# Altium PCB Pranus_PSH-C_B4_2015年3月30日.PcbDoc (part 2 of 2)
Units mil, origin at the board's own origin, x right, y up, seen from the top; angles counter-clockwise.
Board outline 3352.66 x 2784.14 mil, 2 copper layers (Top Layer, Bottom Layer); 108 components, 78 nets, 412 pads, 296 vias.
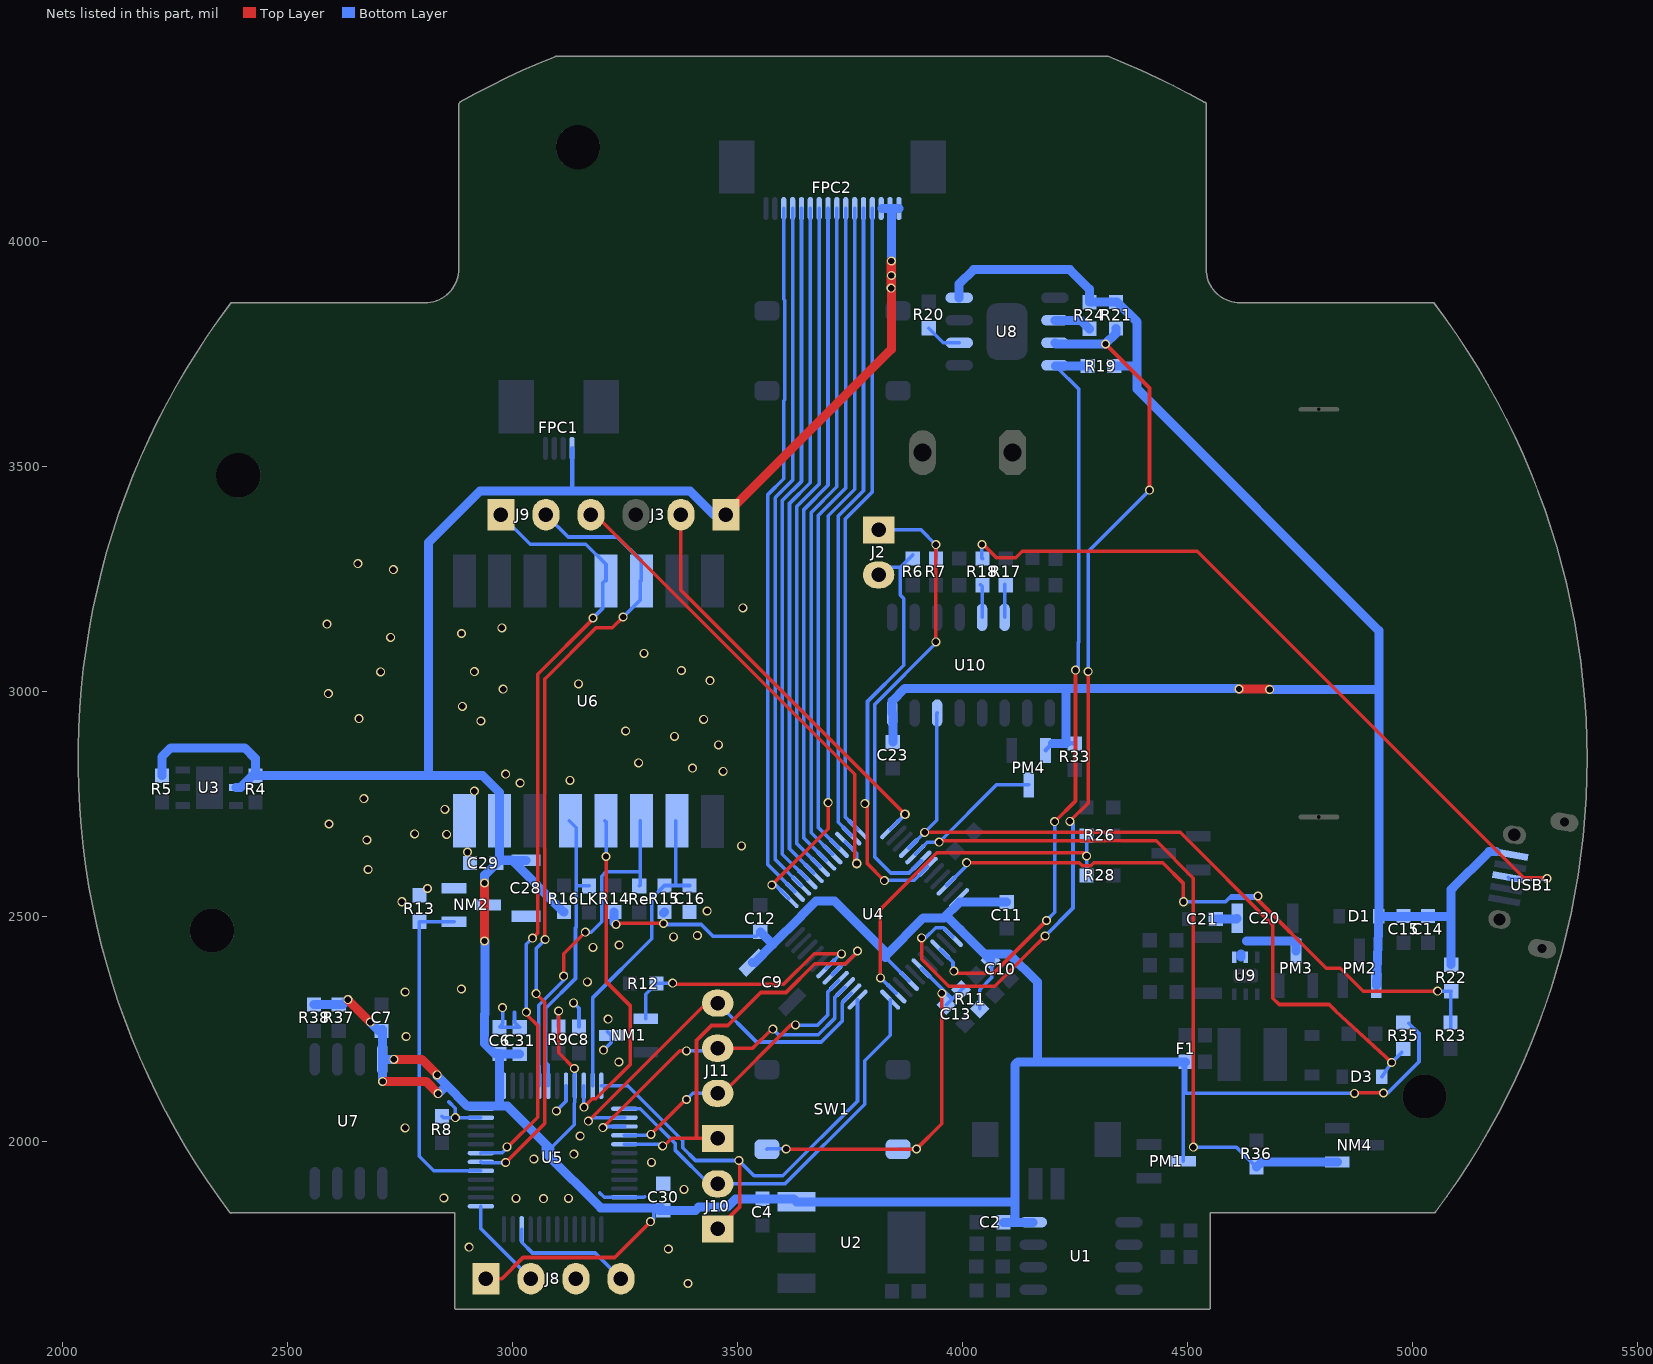
[diagram p2: the nets of this part, all layers, seen from the top]

## Via types
v1: diameter 20, hole 14, Top Layer to Bottom Layer, 294 vias
v2: diameter 22, hole 14, Top Layer to Bottom Layer, 2 vias

## Nets (pads, with @x,y where several pads share a name; then routed paths per layer and width w, separated by ;. In a path a pad name is that pad's centre, name@x,y a point inside that pad or via, vN(x,y) a via of type N, cw(c..) or ccw(c..) an arc to the next point about the centre after c; other vN are vias at no path point) (continued)
NetR18_1: R18.1 USB1.3 | length 1696.9
  Top Layer w8: v1(4043.86,3326.47) 4044.56,3327.17 4044.56,3328.67 4076.26,3296.97 4118.96,3296.97 4133.16,3311.17 4522.44,3311.17 5247.34,2586.27 5297.06,2586.27 v1(5299.16,2584.17)
  Bottom Layer w8: v1(4043.86,3326.47) 4043.86,3296.3 R18.1@4045.06,3295.1 ; USB1.3@5213.29,2586.72 5216.95,2583.07 5298.06,2583.07 v1(5299.16,2584.17)
NetR19_2: R19.2 U4.4 U8.8 | length 1673.8
  Top Layer w8: v1(3981.26,2378.57) 3986.46,2373.37 4069.66,2373.37 v1(4187.36,2491.07) ; v1(4205.56,2710.47) 4251.76,2756.67 v1(4251.76,3047.17)
  Bottom Layer w8: U4.4@3951.32,2426.52 3979.56,2398.28 3979.56,2380.27 v1(3981.26,2378.57) ; v1(4187.36,2491.07) 4205.56,2509.27 v1(4205.56,2710.47) ; U8.8@4206.01,3724.49 4207.73,3722.77 4259.36,3671.14 4259.36,3110.77 4257.56,3108.97 4257.56,3052.97 v1(4251.76,3047.17)
  Bottom Layer w20: U8.8@4207.73,3722.77 R19.2@4278.83,3722.77
NetR20_1: R20.1 U8.2 | length 81.3
  Bottom Layer w8: R20.1@3925.56,3806.84 3957.91,3774.49 U8.2@3993.41,3774.49
NetR21_2: R21.2 U4.2 U8.7 | length 2094.6
  Top Layer w8: v1(3910.02,2452.45) 3910.02,2405.31 3970.26,2345.07 4072.26,2345.07 4148.66,2421.47 4148.87,2421.47 4184.17,2456.77 v1(4184.36,2456.77) ; v1(4239.06,2711.47) 4279.76,2752.17 v1(4279.76,3044.37) ; v1(4318.28,3771.99) 4416.16,3674.12 v1(4416.16,3447.17)
  Bottom Layer w8: v1(3910.02,2452.45) 3918.52,2452.45 3941.03,2474.96 3958.55,2474.96 U4.2@3979.15,2454.36 ; v1(4184.36,2456.77) 4246.26,2518.67 4246.26,2704.27 v1(4239.06,2711.47) ; v1(4279.76,3044.37) 4279.76,3310.77 v1(4416.16,3447.17)
  Bottom Layer w20: U8.7@4206.01,3774.49 4208.5,3771.99 v1(4318.28,3771.99) 4342.06,3795.77 R21.2@4342.06,3806.04
NetR22_1: R22.1 R23.2 U4.46 | length 1464.1
  Top Layer w8: v1(4009.8,2619.36) 4260.36,2619.36 4267.35,2612.37 4285.57,2612.37 4292.56,2619.36 4445.47,2619.36 4491.56,2573.27 v1(4491.56,2532.67) ; v1(4657.06,2545.37) 4652.79,2541.1 4808.92,2384.98 4840.12,2384.98 4891.13,2333.97 v1(5056.36,2333.97)
  Bottom Layer w8: U4.46@3965.24,2568.5 4009.8,2613.06 v1(4009.8,2619.36) ; v1(4491.56,2532.67) 4585.08,2532.67 4592.97,2540.56 ; v1(5056.36,2333.97) 5056.59,2333.74 R22.1@5086.56,2333.74 5085.56,2332.74 R23.2@5085.56,2249.2 ; 4592.97,2540.56 4652.25,2540.56 v1(4657.06,2545.37) 4597.78,2545.37 4592.97,2540.56
NetR24_2: R24.2 U8.6 | length 84.3
  Bottom Layer w20: U8.6@4206.01,3824.49 4263.81,3824.49 R24.2@4282.56,3805.74
NetR26_2: R26.2 R28.1 U4.11 | length 847.8
  Top Layer w8: v1(3818.26,2363.77) 3818.26,2515.87 3943.75,2641.36 4269.47,2641.36 v1(4276.46,2634.37)
  Bottom Layer w8: v1(3818.26,2363.77) 3852.94,2329.09 U4.11@3853.88,2329.09 ; R26.2@4276.46,2680.2 v1(4276.46,2634.37) ; v1(4276.46,2634.37) 4276.36,2634.27 R28.1@4276.36,2591 4276.46,2591.1 v1(4276.46,2634.37)
NSWCLK: J8.2 U5.37 | length 207
  Bottom Layer w8: U5.37@2930.71,1856.14 2930.71,1806.22 J8.2@3041.76,1695.17
NSWDIO: J8.4 U5.34 | length 282.9
  Bottom Layer w8: U5.34@3021.26,1804.96 3021.26,1776.11 3045.2,1752.17 3184.76,1752.17 J8.4@3241.76,1695.17
P_3.3V: C2.2 C4.2 C6.1 C7.1 C9.A C10.1 C11.1 C12.1 C28.A C29.1 C30.1 C31.1 F1.2 FPC1.4 FPC2.14 FPC2.15 FPC2.16 J3.1 J8.1 PM1.3 R4.1 R5.1 R9.2 R11.1 R14.2 R15.2 R16.2 R35.2 R37.2 R38.1 U1.8 U2.3 U3.5 U4.1 U4.9 U4.24 U4.48 U5.1 U5.9 U5.24 U5.48 U6.15 U7.8 | length 10643.6
  Top Layer w8: J8.1@2941.76,1695.17 2977.36,1695.17 3024.36,1742.17 3227.76,1742.17 v1(3307.36,1821.77) ; v1(3103.46,2289.97) 3103.46,2197.11 v1(3138.26,2162.3) ; v1(3230.76,2482.37) 3232.86,2484.47 v1(3336.46,2484.47) ; v1(4871.75,2106.87) 4872.82,2107.94 v1(4936.1,2107.94)
  Top Layer w20: v1(2635,2315) v1(2685,2265) ; v1(2712.26,2133.37) 2808.66,2133.37 v1(2835.66,2106.37) ; v1(2737.16,2182.67) 2798.86,2182.67 v1(2833.56,2147.97) ; v1(2938.76,2445.27) v1(2938.76,2574.27) ; J3.1@3475.06,3392.67 3842.56,3760.17 3842.56,3956.27 3842.06,3955.77 v1(3842.06,3895.97)
  Bottom Layer w8: 3084.54,1983.87 3137.76,2037.09 3137.76,2085.28 3139.37,2086.9 U5.9@3139.37,2123.86 3139.37,2161.2 v1(3138.26,2162.3) ; R9.2@3102.72,2255.1 3102.72,2289.23 v1(3103.46,2289.97) ; 3132.64,3445.67 3133.2,3446.23 ; v1(3307.36,1821.77) 3315.03,1829.44 3315.03,1840.84 ; v1(3336.46,2484.47) 3338.87,2482.06 3420.26,2482.06 3446.69,2455.63 3541.03,2455.63 C12.1@3551.32,2465.92 ; 3829.87,2408.77 U4.9@3881.72,2356.92 ; R11.1@4039.13,2295.44 4038.9,2295.67 4038.9,2337.41 4065.68,2364.2 4065.68,2400.59 C10.1@4063.11,2403.16 ; C2.2@4091.41,1820.64 C2.2@4091.5,1820.55 ; PM1.3@4491.55,1955.92 4491.55,2172.32 F1.2@4496.24,2177.01 4496.24,2106.87 v1(4871.75,2106.87) ; v1(4936.1,2107.94) 4945.82,2107.94 5015,2177.12 5015,2240 R35.2@4992.34,2262.66
  Bottom Layer w10: 3133.2,3446.23 FPC1.4@3133.2,3540.07
  Bottom Layer w20: R5.1@2221.86,2812.7 2221.86,2854.47 2241.96,2874.57 2405.92,2874.57 2429.86,2850.63 R4.1@2429.86,2812.7 ; U3.5@2386.47,2786.2 2396.17,2786.2 2422.67,2812.7 R4.1@2429.86,2812.7 ; R38.1@2560,2304.53 R37.2@2615,2304.53 2624.53,2304.53 v1(2635,2315) ; v1(2685,2265) 2704.53,2245.47 C7.1@2710,2245.47 ; C7.1@2712.19,2249.07 2712.19,2183.01 U7.8@2711.85,2182.67 ; v1(2712.26,2133.37) 2711.85,2133.78 U7.8@2711.85,2182.67 ; v1(2737.16,2182.67) U7.8@2711.85,2182.67 ; 2814.06,2815.77 2814.06,3330.57 2929.16,3445.67 3132.64,3445.67 3394.94,3445.67 3447.94,3392.67 J3.1@3475.06,3392.67 ; v1(2833.56,2147.97) 2833.56,2145.85 2853.32,2126.09 ; v1(2835.66,2106.37) 2853.32,2124.03 2853.32,2126.09 ; v1(2938.76,2445.27) 2939.26,2445.77 2939.26,2283.21 2938.48,2282.43 2938.48,2217.85 2960.64,2195.69 C6.1@2972.23,2195.69 ; v1(2938.76,2574.27) 2938.76,2591.9 C29.1@2965.49,2618.63 C29.1@2971.54,2624.68 ; 2972.23,2090.87 C6.1@2972.23,2195.69 ; C31.1@3016.82,2194.63 2973.29,2194.63 C6.1@2972.23,2195.69 ; C28.A@3030.78,2624.68 C28.A@3000.21,2624.68 ; 3074.85,1993.56 3074.85,1974.18 3196.54,1852.49 C30.1@3330.31,1852.49 ; 3084.54,1983.87 2989.74,2078.67 2900.74,2078.67 2853.32,2126.09 ; R16.2@3115.07,2509.81 C28.A@3000.21,2624.68 ; R14.2@3226.75,2509.81 3226.75,2486.38 v1(3230.76,2482.37) ; C30.1@3326.69,1847.14 3407.48,1847.14 3414.4,1854.07 3477.74,1854.07 3496.33,1872.66 C4.2@3556.27,1872.66 3625.34,1872.66 U2.3@3632.03,1865.96 4113.98,1865.96 4117.13,1869.11 ; R15.2@3336.46,2507.85 R15.2@3338.42,2509.81 ; C9.A@3534.35,2397.55 3539.16,2397.55 3579.43,2437.82 ; C12.1@3551.32,2465.92 3579.43,2437.82 ; FPC2.14@3822.34,4072.9 FPC2.15@3839.71,4072.9 ; 3827.76,2422.85 3716.14,2534.47 3675.49,2534.47 3641.36,2500.34 3641.36,2499.75 3579.43,2437.82 ; 3829.87,2408.77 3829.87,2412.99 3913.85,2496.97 3959.16,2496.97 3994.19,2532 C11.1@4098.91,2532 ; v1(3842.06,3895.97) 3842.56,3896.47 3842.56,4070.05 FPC2.15@3839.71,4072.9 ; FPC2.16@3859.4,4072.9 FPC2.15@3839.71,4072.9 ; 3969.3,2496.97 U4.1@3995.7,2470.57 ; U4.1@3995.36,2470.57 U4.1@3995.7,2470.57 ; 4049.9,2416.37 4104.91,2416.37 4166.86,2354.42 4166.86,2183.21 4173.06,2177.01 ; C10.1@4063.11,2403.16 U4.1@3995.7,2470.57 ; C2.2@4091.5,1820.55 4117.13,1820.55 ; U1.8@4157.84,1820.55 4117.13,1820.55 ; F1.2@4496.24,2177.01 4173.06,2177.01 ; R4.1@2429.86,2812.7 2934.63,2812.7 2972.47,2774.86 U6.15@2972.47,2712.67 C29.1@2972.47,2625.62 ; C29.1@2971.54,2624.68 C28.A@3000.21,2624.68 ; C29.1@2971.54,2624.68 C29.1@2972.47,2625.62 ; C29.1@2972.47,2625.62 2999.27,2625.62 C28.A@3000.21,2624.68 ; 4117.13,1820.55 4117.13,1869.11 ; 4117.13,1869.11 4117.13,2170.42 4123.72,2177.01 4173.06,2177.01
  other v1: 3842.66,3924.07 3842.66,3956.27
PSUPPLY: C14.2 C15.2 C23.1 D1.A PM2.1 PM4.2 R19.1 R21.1 R22.2 R24.1 R33.1 U8.4 U10.16 USB1.1 | length 4179.9
  Top Layer w20: v1(4615.03,3005.43) 4681.64,3005.43 v1(4682.99,3004.08)
  Bottom Layer w10: PM4.2@4185.16,2869.06 4200.63,2884.53 R33.1@4250,2884.53
  Bottom Layer w20: C23.1@3845.86,2887.5 3845.86,2950.31 U10.16@3844.2,2951.97 3844.2,2978.31 3872.76,3006.87 4230.3,3006.87 ; U8.4@3993.41,3874.49 3993.41,3905.42 4025.16,3937.17 4239.06,3937.17 4282.56,3893.67 R24.1@4282.56,3864.8 4282.86,3865.1 R21.1@4342.06,3865.1 4344.43,3865.1 4388.37,3821.16 4388.37,3672.28 4925.66,3135 4925.66,3004.08 ; 4200.63,2884.53 4230.3,2884.53 4230.3,3006.87 ; R19.1@4337.89,3722.77 4380.56,3722.77 ; v1(4615.03,3005.43) 4613.59,3006.87 4230.3,3006.87 ; v1(4682.99,3004.08) 4925.66,3004.08 ; PM2.1@4920.16,2346.78 D1.A@4925.66,2500.17 ; R22.2@5086.56,2392.8 5086.56,2559.97 ; 5090.11,2563.52 5086.56,2559.97 ; 5185.76,2644.17 5170.76,2644.17 5086.56,2559.97 ; D1.A@4925.66,2500.17 4980.76,2500.44 5086.56,2500.44 5086.56,2559.97 ; D1.A@4925.66,2500.17 4925.66,3004.08
PSUPPLYBAT: C20.A C21.2 PM3.3 U9.4 U9.5 | length 187.5
  Bottom Layer w20: C21.2@4563.22,2494.24 4609.09,2494.24 C20.A@4610.73,2495.88 ; 4619.76,2409.85 4619.76,2417.02 ; 4631.25,2445.17 4741.76,2445.17 PM3.3@4741.76,2423.56
S_3.3V_RXD: J2.2 R6.1 U4.43 | length 965
  Top Layer w8: v1@3784.46,2750.47 3788.76,2754.77 3788.76,2617.57 v1(3826.86,2579.47)
  Bottom Layer w8: v1(3783.56,2750.47) 3789.64,2756.55 3789.64,2977.49 3870.39,3058.24 3870.39,3206.24 3862.31,3214.32 3862.31,3275.45 ; J2.2@3814.16,3258.97 3830.64,3275.45 3862.31,3275.45 ; v1(3826.86,2579.47) 3827.86,2580.47 3893.69,2580.47 U4.43@3923.48,2610.26 ; R6.1@3890.06,3303.2 3862.31,3275.45
S_3.3V_TXD: J2.1 R7.1 U4.42 | length 1052.5
  Top Layer w8: v1(3941.46,3110.17) v1(3941.46,3326.07)
  Bottom Layer w8: J2.1@3814.16,3358.97 3908.56,3358.97 v1(3941.46,3326.07) 3941.73,3325.8 R7.1@3941.73,3295.1 ; U4.42@3909.56,2624.18 3881.85,2596.47 3841.16,2596.47 3805.64,2631.99 3805.64,2970.86 3941.46,3106.68 v1(3941.46,3110.17)
S_138A0: FPC2.5 U4.28 | length 1531.2
  Bottom Layer w8: FPC2.5@3642.86,4072.9 3642.86,3466.59 3600.36,3424.09 3600.36,2638.28 U4.28@3656.22,2582.42
S_138A1: FPC2.4 U4.27 | length 1544.5
  Bottom Layer w8: FPC2.4@3623.18,4072.9 3623.18,3469.53 3584.36,3430.72 3584.36,2626.44 U4.27@3642.3,2568.5
S_138A2: FPC2.3 U4.26 | length 1559.5
  Bottom Layer w8: FPC2.3@3603.49,4072.9 3603.49,3871.04 3605.65,3868.88 3605.65,3647.86 3603.49,3645.7 3603.49,3472.48 3568.36,3437.34 3568.36,2614.61 U4.26@3628.39,2554.58
S__CRTLIN: D3.A R35.1 U4.40 U10.14 | length 1738.4
  Top Layer w8: v1(3916.69,2687.01) 4484.26,2687.01 4690.21,2481.06 4690.21,2318.37 4704.21,2304.37 4815.6,2304.37 4828.9,2291.07 4828.9,2290.71 v1(4954.17,2175.44)
  Bottom Layer w8: U4.40@3881.72,2652.02 v1(3916.69,2687.01) 3943.36,2713.68 3943.36,2890.4 3943.36,2951.13 U10.14@3944.2,2951.97 ; D3.A@4932.07,2143.94 4932.67,2143.94 v1(4954.17,2175.44) R35.1@4976.62,2197.89
S__CRTLOUT: NM4.1 PM4.3 R36.2 U4.41 | length 1857
  Top Layer w8: v1(3948.76,2664.97) 3951.66,2667.87 4430.86,2667.87 4513.56,2585.17 v1(4513.56,1987.37)
  Bottom Layer w8: U4.41@3895.64,2638.1 3922.51,2664.97 v1(3948.76,2664.97) 4076.07,2792.28 PM4.3@4147.76,2792.28 ; v1(4513.56,1987.37) 4609.24,1987.37 R36.2@4653.76,1942.85
  Bottom Layer w20: R36.2@4653.76,1942.85 4665.26,1954.35 NM4.1@4833.3,1954.35
S_BRIGHT: FPC2.6 U4.29 | length 1518
  Bottom Layer w8: FPC2.6@3662.55,4072.9 3662.55,3463.65 3616.36,3417.46 3616.36,2650.12 U4.29@3670.14,2596.34
S_CLK: FPC2.12 U4.35 | length 1428.5
  Bottom Layer w8: U4.35@3753.66,2679.85 3724.36,2709.16 3724.36,3389.7 3780.66,3445.99 FPC2.12@3780.66,4072.9
S_LE: FPC2.11 U4.25 | length 1629.7
  Top Layer w8: v1(3577.16,2569.87) 3702.36,2695.07 v1(3702.36,2752.67)
  Bottom Layer w8: v1(3577.16,2569.87) 3585.26,2569.87 U4.25@3614.47,2540.66 U4.25@3614.47,2539.58 ; v1(3702.36,2752.67) 3702.36,3390.32 3760.97,3448.94 FPC2.11@3760.97,4072.9
S_O\E\: FPC2.10 U4.33 | length 1465
  Bottom Layer w8: U4.33@3725.82,2652.02 3680.36,2697.48 3680.36,3390.95 3741.29,3451.88 FPC2.10@3741.29,4072.9
S_RESET: C13.1 R11.2 SW1.1 SW1.4 U4.7 | length 912.7
  Top Layer w8: v1(3609.06,1983.47) 3609.36,1983.17 v1(3898.66,1983.17) 3954.76,2039.27 v1(3954.76,2329.37)
  Bottom Layer w8: SW1.1@3566.09,1982.59 3566.97,1983.47 v1(3609.06,1983.47) ; SW1.4@3866.59,1982.59 SW1.4@3857.43,1982.59 3858.01,1983.17 v1(3898.66,1983.17) ; U4.7@3909.56,2384.76 v1@3961.86,2332.47 ; v1(3954.76,2329.37) 3958.76,2329.37 v1@3961.86,2332.47 ; C13.1@3964.56,2303.47 3978.71,2317.62 ; R11.2@4002.93,2341.83 3978.71,2317.62 ; v1@3961.86,2332.47 3976.7,2317.62 3978.71,2317.62
S_RGBB: FPC2.7 U4.30 | length 1504.7
  Bottom Layer w8: FPC2.7@3682.23,4072.9 3682.23,3460.71 3632.36,3410.83 3632.36,2661.96 U4.30@3684.06,2610.26
S_RGBG: FPC2.8 U4.31 | length 1491.5
  Bottom Layer w8: U4.31@3697.98,2624.18 3648.36,2673.8 3648.36,3404.21 3701.92,3457.76 FPC2.8@3701.92,4072.9
S_RGBR: FPC2.9 U4.32 | length 1478.2
  Bottom Layer w8: U4.32@3711.9,2638.1 3664.36,2685.64 3664.36,3397.58 3721.6,3454.82 FPC2.9@3721.6,4072.9
S_SDI: FPC2.13 U4.36 | length 1415.2
  Bottom Layer w8: U4.36@3767.58,2693.77 3740.36,2720.99 3740.36,3383.07 3800.34,3443.05 FPC2.13@3800.34,4072.9
S_UD+: R18.2 U10.5 | length 73.9
  Bottom Layer w8: R18.2@4040.76,3237.04 4044.2,3233.6 U10.5@4044.2,3164.57
S_UD-: R17.2 U10.6 | length 73.9
  Bottom Layer w8: U10.6@4094.2,3164.57 4094.2,3237.58 R17.2@4094.86,3238.24
SPI1_MISO: J11.2 U4.16 U5.16 | length 648.9
  Top Layer w8: v1(3308.66,2015.97) 3386.06,2093.37 v1(3387.66,2093.37) ; J11.2@3456.76,2107.17 3467.77,2107.17 3619.75,2259.15 v1(3629.62,2259.15)
  Bottom Layer w8: U5.16@3249.61,2013.62 3306.31,2013.62 v1(3308.66,2015.97) ; v1(3387.66,2093.37) 3401.46,2107.17 J11.2@3456.76,2107.17 ; v1@3629.62,2258.27 3678.56,2258.27 3701.26,2280.97 3701.26,2332.36 U4.16@3725.82,2356.92
SPI1_MOSI: J11.1 U4.17 U5.17 | length 998.4
  Top Layer w8: v1(3334.56,1990.47) 3338.06,1990.47 3354.76,2007.17 J11.1@3456.76,2007.17 3410.16,2007.17 3409.76,2007.57 3409.76,2224.57 3442.86,2257.67 3479.07,2257.67 3552.49,2331.09 3608.68,2331.09 3672.56,2394.97 3740.77,2394.97 3767.16,2421.36 v1(3767.16,2423.17)
  Bottom Layer w8: U5.17@3249.61,1993.94 3331.09,1993.94 v1(3334.56,1990.47) ; U4.17@3711.9,2370.84 3736.03,2394.97 3740.77,2394.97 3767.16,2421.36 v1(3767.16,2423.17)
SPI1_NSS/MASTERSTATE: J11.4 U4.14 U5.14 | length 880.6
  Top Layer w8: v1(3169.36,2045.27) 3431.26,2307.17 J11.4@3456.76,2307.17
  Bottom Layer w8: v1(3169.36,2045.27) 3177.08,2052.99 U5.14@3249.61,2052.99 ; J11.4@3456.76,2307.17 3542.78,2221.15 3686.69,2221.15 3733.26,2267.71 3733.26,2308.68 U4.14@3753.66,2329.09
SPI1_SCK/SLAVESTATE: J11.3 U4.15 U5.15 | length 753.8
  Top Layer w8: v1(3201.66,2030.77) 3372.26,2201.37 v1(3387.66,2201.37) ; J11.3@3456.76,2207.17 3534.13,2207.17 3576.63,2249.67 v1(3579.16,2249.67)
  Bottom Layer w8: v1(3201.66,2030.77) 3204.2,2033.31 U5.15@3249.61,2033.31 ; v1(3387.66,2201.37) 3450.96,2201.37 J11.3@3456.76,2207.17 ; v1(3579.16,2249.67) 3591.68,2237.15 3680.07,2237.15 3717.26,2274.34 3717.26,2320.52 U4.15@3739.74,2343
SWCLK: J3.2 U4.37 | length 918.6
  Top Layer w8: J3.2@3375.06,3392.67 3375.06,3224.77 v2(3872.76,2727.07)
  Bottom Layer w8: U4.37@3839.96,2693.77 3872.76,2726.57 v2(3872.76,2727.07)
SWDIO: J3.4 U4.34 | length 1084.7
  Top Layer w8: J3.4@3175.06,3392.67 3184.53,3392.67 3761.56,2815.64 3761.56,2621.67 v2(3765.76,2617.47)
  Bottom Layer w8: U4.34@3739.74,2665.94 3765.76,2639.92 v2(3765.76,2617.47)
USART2_RXD: J10.1 U4.13 U5.12 | length 1128.3
  Top Layer w8: J10.1@3456.86,1806.07 3506.16,1855.37 3506.16,1955.27 v1(3503.66,1957.77)
  Bottom Layer w8: U5.12@3198.43,2123.86 3257.07,2123.86 3379.16,2001.77 3379.16,1986.17 3407.56,1957.77 v1(3503.66,1957.77) 3537.56,1923.87 3601.46,1923.87 3767.26,2089.67 3767.26,2314.85 U4.13@3767.58,2315.17
USART2_TXD: J10.2 U4.12 U5.13 | length 940.3
  Bottom Layer w8: U5.13@3249.61,2072.68 3284.85,2072.68 3362.86,1994.67 3362.86,1979.84 3436.63,1906.07 J10.2@3456.86,1906.07 3606.29,1906.07 3783.26,2083.04 3783.26,2179.17 3839.96,2235.87 U4.12@3839.96,2315.17
WIFI_NLINK: LK.C U5.6 U6.13 | length 654.5
  Bottom Layer w8: U5.6@3080.32,2123.86 3080.32,2169.98 3074.97,2175.32 3074.97,2296.18 3140.76,2361.97 3140.76,2474.28 3142.82,2476.34 3142.82,2566.17 ; U6.13@3127.25,2712.75 3142.82,2697.18 3142.82,2566.17 ; LK.C@3170.91,2567.88 3144.54,2567.88 3142.82,2566.17
WIFI_POWER: NM1.1 R12.2 U4.18 | length 575.3
  Top Layer w8: v1(3356.66,2351.87) 3359.36,2349.17 3603.15,2349.17 3670.95,2416.97 v1(3731.66,2416.97)
  Bottom Layer w8: NM1.1@3296.97,2272.97 3296.97,2327.13 R12.2@3320.69,2350.85 3321.71,2351.87 v1(3356.66,2351.87) ; U4.18@3697.98,2384.76 3730.19,2416.97 v1(3731.66,2416.97)
WIFI_READY: Re.C U5.5 U6.11 | length 785.2
  Top Layer w8: v1(3114.66,2367.17) 3114.66,2417.07 v1(3162.76,2465.17) v1@3160.76,2467.17
  Bottom Layer w8: U5.5@3060.63,2123.86 3060.63,2167.04 3058.97,2168.7 3058.97,2302.88 3119.96,2363.87 3119.96,2372.47 v1(3114.66,2367.17) ; v1(3162.76,2465.17) 3175.72,2465.17 3199,2488.45 3199,2589.59 3208.41,2599 3284.51,2599 3284.68,2599.17 ; Re.C@3282.59,2567.88 3284.68,2569.98 3284.68,2599.17 ; U6.11@3284.68,2712.75 3284.68,2599.17
WIFI_RESET: C16.1 R15.1 U5.11 U6.10 | length 711.1
  Bottom Layer w8: U5.11@3178.74,2123.86 3178.74,2318.65 3310.33,2450.24 3310.33,2540.78 R15.1@3338.42,2568.87 3362.76,2568.87 ; U6.10@3363.4,2712.75 3363.4,2569.5 3362.76,2568.87 ; C16.1@3394.26,2568.87 3362.76,2568.87
WIFI_RLD: U5.10 U6.12 | length 756
  Top Layer w8: v1(3159.76,2076.17) 3178.26,2094.67 3185.97,2094.67 3262.46,2171.16 3262.46,2302.67 3261.96,2302.17 3208.76,2355.37 v1(3208.76,2633.17)
  Bottom Layer w8: U5.10@3159.06,2123.86 3159.06,2076.87 v1(3159.76,2076.17) ; U6.12@3205.97,2712.75 3208.76,2709.96 v1(3208.76,2633.17)
WIFI_RXD: J9.1 U5.43 U6.5 | length 1752.8
  Top Layer w8: v1(2988.76,1988.17) 2988.76,1986.17 3056.76,2054.17 3056.76,2257.57 3031.46,2282.87 v1(3031.46,2287.47) ; v1(3045.36,2451.87) 3056.76,2463.27 3056.76,3038.17 v1@3180.76,3162.17
  Bottom Layer w8: U5.43@2930.71,1974.25 2931.63,1975.17 2977.76,1975.17 2988.76,1986.17 v1(2988.76,1988.17) ; J9.1@2975.06,3392.67 3040.56,3327.17 3163.76,3327.17 3208.62,3282.31 U6.5@3208.62,3245.67 ; v1(3031.46,2287.47) 3031.46,2437.97 v1(3045.36,2451.87) ; v1(3179.76,3163.17) 3201.76,3185.17 3201.76,3241.54 U6.5@3205.97,3245.75
WIFI_TXD: J9.2 U5.42 U6.6 | length 1807.9
  Top Layer w8: v1(2985.76,1953.17) 3072.76,2040.17 3072.76,2309.18 v1(3053.46,2328.48) ; 3072.76,3027.54 3072.76,2449.27 v1(3073.36,2448.67) ; 3073.36,3028.14 3186.39,3141.17 3222.76,3141.17 v1(3246.76,3165.17)
  Bottom Layer w8: U5.42@2930.71,1954.57 2932.11,1953.17 v1(2985.76,1953.17) ; v1(3053.46,2328.48) 3053.46,2428.77 v1(3073.36,2448.67) ; J9.2@3075.06,3392.67 3124.56,3343.17 3233.76,3343.17 3287.33,3289.6 U6.6@3287.33,3245.67 ; v1(3246.76,3165.17) 3284.68,3203.09 U6.6@3284.68,3245.75
WIFIGND: C6.2 C8.2 C16.2 C30.2 C31.2 J8.3 NM1.3 NM2.2 R8.2 R13.1 U5.8 U5.23 U5.47 | length 535.8
  Bottom Layer w8: R8.2@2844.01,2056.1 2847.04,2053.07 v1(2873.76,2053.07) ; 2859.56,2087.77 2873.76,2073.57 v1(2873.76,2053.07) ; U5.47@2930.71,2052.99 2873.84,2052.99 v1(2873.76,2053.07) ; v1(2978.76,2297.17) 2978.76,2261.28 2972.23,2254.75 2973.29,2253.69 C31.2@3016.82,2253.69 3005.26,2265.25 3005.26,2287.07 ; v1(3098.26,2067.97) 3119.69,2089.4 U5.8@3119.69,2123.86 ; v1(3136.16,2308.17) 3148.51,2295.82 C8.2@3148.51,2255.11 ; 3194.56,1885.67 3204.4,1875.83 U5.23@3249.61,1875.83 3292.82,1875.83 3294.36,1877.37 ; v1(3203.06,2202.97) 3220.19,2220.1 NM1.3@3220.19,2235.57 NM1.3@3211.86,2243.9
  other v1: 3390.96,1684.37 3347.16,1761.37 2904.66,1765.17 3069.76,1873.07 3008.66,1873.67 3125.26,1873.87 2848.26,1874.57 3381.96,1893.77 3309.76,1953.67 3048.36,1961.07 3137.06,1971.67 3151.26,2012.07 2762.56,2030.47 3236.96,2176.77 2764.56,2233.37 3213.46,2271.68 2762.56,2332.17 2887.06,2338.67 3167.05,2354.66 3179.71,2431.47 3237.91,2436.41 3358.46,2454.87 3411.56,2457.47 3433.46,2511.97 2755.06,2532.67 2811.86,2562.27
WIFIMOUDLEGND: C28.C C29.2 NM2.3 U6.16
  other v1: 2680.26,2604.47 2900.86,2642.67 3509.46,2656.87 2677.16,2670.07 2854.46,2682.47 2783.66,2683.67 2592.96,2705.37 2850.46,2738.17 2670.36,2761.67 2915.96,2778.47 3017.76,2796.47 3128.56,2802.47 2985.66,2816.27 3468.76,2822.37 3400.76,2829.37 3281.16,2841.37 3458.56,2881.17 3360.86,2900.17 3252.26,2912.07 2930.36,2934.37 3425.66,2938.07 2659.86,2939.37 2889.36,2966.97 2591.76,2995.07 2980.06,3004.87 3147.56,3016.77 3439.56,3023.77 2708.06,3043.37 2916.06,3043.97 3375.86,3046.67 3293.06,3084.57 2730.16,3120.17 2887.36,3128.47 2977.06,3141.37 2588.56,3149.37 3512.56,3185.87 2735.96,3270.47 2657.16,3283.67
WIFIPOWER: NM2.1 R13.2 U5.41 | length 748.3
  Bottom Layer w8: NM2.1@2871.05,2488.15 2793.98,2488.15 R13.2@2793.91,2488.08 2793.91,1967.02 2826.05,1934.88 U5.41@2930.71,1934.88
pads on no net: FPC1. FPC2. J1. J4.1 J5.1 J6.1 J7.1 U1.5 U1.6 U1.7 U3.3 U3.4 U4.5 U4.6 U4.38 U4.39 U4.45 U5.2 U5.3 U5.4 U5.20 U5.21 U5.22 U5.25 U5.26 U5.27 U5.28 U5.29 U5.30 U5.31 U5.32 U5.33 U5.35 U5.36 U5.38 U5.39 U5.40 U5.45 U5.46 U6.1 U6.2 U6.3 U6.4 U6.7 U6.8 U6.9 U6.14 U10.9 U10.10 U10.11 U10.12 U10.15 USB1. USB1.0 USB1.4
copper on no net:
  other v1: 3012.96,2461.17 2967.46,2488.07

## Polygon pours and split planes (outlines as drawn)
GND on Top Layer "Top Layer-No Net" (solid, remove dead copper, pour order 11): 5455,4645 1705,4645 1700,4650 1700,1525 5455,1525
WIFIMOUDLEGND on Top Layer "Top Layer-No Net 1" (solid, remove dead copper, pour order 8): 3550.46,3317.6 3541.76,3327.37 2555.06,3327.37 2555.06,2537.3 2536.06,2515.96 2565.26,2483.17 3537.36,2483.17
WIFIGND on Top Layer "Bottom Layer-No Net" (solid, remove dead copper, pour order 12): 3532.26,2620.97 2555.11,2620.97 2554.36,2621.72 2542.26,2609.62 2542.26,2349.57 2739.46,2349.57 2739.46,1492.37 2743.36,1488.47 2757.06,1474.77 3418.96,1474.77 3418.96,2147.47 3419.36,2147.87 3417.16,2145.67 3248.56,2145.67 3248.56,2301.57 3247.46,2302.67 3242.56,2297.77 3178.04,2297.77 3178.04,2399.09 3175.76,2401.37 3179.56,2405.17 3464.06,2405.17
GND on Bottom Layer "Top Layer-No Net" (solid, remove dead copper, pour order 9): 5460,4660 1710,4660 1705,4665 1705,1540 5460,1540
WIFIMOUDLEGND on Bottom Layer "Top Layer-No Net 1" (solid, remove dead copper, pour order 7): 3550.46,3317.53 3541.76,3327.37 2555.06,3327.37 2555.06,2531.41 2536.06,2509.91 2565.26,2476.87 3537.36,2476.87
WIFIGND on Bottom Layer "Bottom Layer-No Net" (solid, remove dead copper, pour order 10): 3532.96,2620.97 2555.81,2620.97 2555.06,2621.72 2542.96,2609.62 2542.96,2349.57 2740.16,2349.57 2740.16,1492.37 2744.06,1488.47 2757.76,1474.77 3419.66,1474.77 3419.66,2147.47 3420.06,2147.87 3417.86,2145.67 3249.26,2145.67 3249.26,2301.57 3248.16,2302.67 3243.26,2297.77 3178.74,2297.77 3178.74,2399.09 3176.46,2401.37 3180.26,2405.17 3464.76,2405.17

## Keep-outs
Keep-Out Layer:
  lines w6.3: 2375.37,1844.69 2875.22,1844.69 2875.22,1630.69 4548.45,1630.69 4548.45,1844.99 5048.85,1844.99 ; 2375.47,1844.27 cw(c3711.84,2851.16) 2377.27,3860.44 2806.32,3860.44 ccw(c2806.32,3939.18) 2885.06,3939.18 2885.06,4305.86 cw(c3711.83,2851.15) 3098.61,4407.97 ; 3098.39,4408.5 4322.19,4408.5 4322.63,4408.06 ; 4322.09,4408.27 cw(c3711.83,2851.15) 4538.22,4305.15 ; 4538.61,4305.86 4538.61,3939.18 ccw(c4617.35,3939.18) 4617.35,3860.44 5046.4,3860.44 cw(c3711.84,2851.16) 5048.85,1845.13

## Other copper
Bottom Layer:
  rectangle net NetC17_A: 4503.85,2226.13 4576.83,2329.25
  rectangle net NetC17_A: 4480.18,2219.55 4589.35,2251.57
  region net NetL1_2: 4651.51,2134.21 4675,2134.37 4673.65,2340.58 4650.16,2340.43
  rectangle net NetC17_A: 4401.51,2316.57 4576.72,2348.29
  rectangle net PSUPPLYBAT: 4597.94,2396.85 4633.76,2528.56

## Silkscreen, mask and mechanical layers (free items; w line width, h text height)
Bottom Overlay:
  lines w5.91: 3406.76,2357.17 3406.76,1745.17 3291.76,1745.17 2890.86,1745.17 2890.86,1856.87 2425,1856.87 2425,2410 2741.46,2410 2741.46,2637.31 2623.76,2637.31 2623.76,3316.57 3547.91,3316.57 3547.91,2683.46 3431.63,2567.18 3431.63,2358.02 ; 4445,2788.2 4580,2788.2 4580,2542.17 5037.46,2542.17 5164.06,2415.57 5164.06,2158.02 4960.96,2158.02 4960.96,1902.65 4616.23,1902.65 4616.23,2054.95 4453.92,2054.95 4453.92,2292.27 4242.99,2292.26 4242.99,2788.2 ; 4450,2788.2 4242.99,2788.2 ; 4678.18,2320.67 4680.74,2318.11 4680.74,2320.67 4682.57,2318.84 4682.57,2320.67 ; 4242.99,2788.2 4242.99,2754.97 3815.56,2754.97 3755.06,2815.47 3755.06,3629.77 3894.96,3629.77 3894.96,3970.9 4496.92,3970.9 4496.92,3676.77 4247.56,3676.77 4247.56,3444.57 4247.56,2920 4352.66,2920 4352.66,2788.2 4242.99,2788.2 ; 4682.57,2320.67 4681.1,2322.14 4679.27,2322.14 4677.8,2320.67 4682.57,2320.67 ; 2143.21,2708.29 2516.08,2708.29 2516.08,2902.23 2143.21,2902.23 2143.21,2708.29 ; 3523.63,1637.98 3523.63,1921.71 3989.65,1921.71 3989.65,2118.55 4402.8,2118.55 4402.8,2036.79 4536.97,2036.79 4536.97,1637.98 3523.63,1637.98
  text "+" at 3498.76,3439.67 h40
  text "T/R" at 2902.36,3364.47 h40
  text "T/R" at 3738.03,3362.36 h40 r90
  text "+" at 2891.76,1745.17 h40
  text "T/R" at 3502.36,1676.97 h40
Mechanical 1:
  lines w6.3: 3711.84,1864.06 3711.84,4004.05 ; 5292.67,2407.51 5300.19,2450.16 ; 5341.55,2684.73 5349.07,2727.38

## Text inside footprints (layer, text, board x,y; h text height)
U1: Mechanical 15 "1" at 4246.43,1739.08 h29.53 r270
U6: Bottom Overlay "ANT" at 2718.76,2740.67 h60 r270
U7: Mechanical 15 "1" at 2630.39,2062.59 h29.53 r180
U8: Mechanical 15 "1" at 4117.42,3805.96 h29.53 r90
U10: Mechanical 15 "1" at 4025.67,3040.56 h29.53